# Altium PCB PCB_SquareishDesign.PcbDoc
Units mil, origin at the board's own origin, x right, y up, seen from the top; angles counter-clockwise.
Board outline 4724.41 x 4724.41 mil, 2 copper layers (Top Layer, Bottom Layer); 75 components, 82 nets, 287 pads, 121 vias.
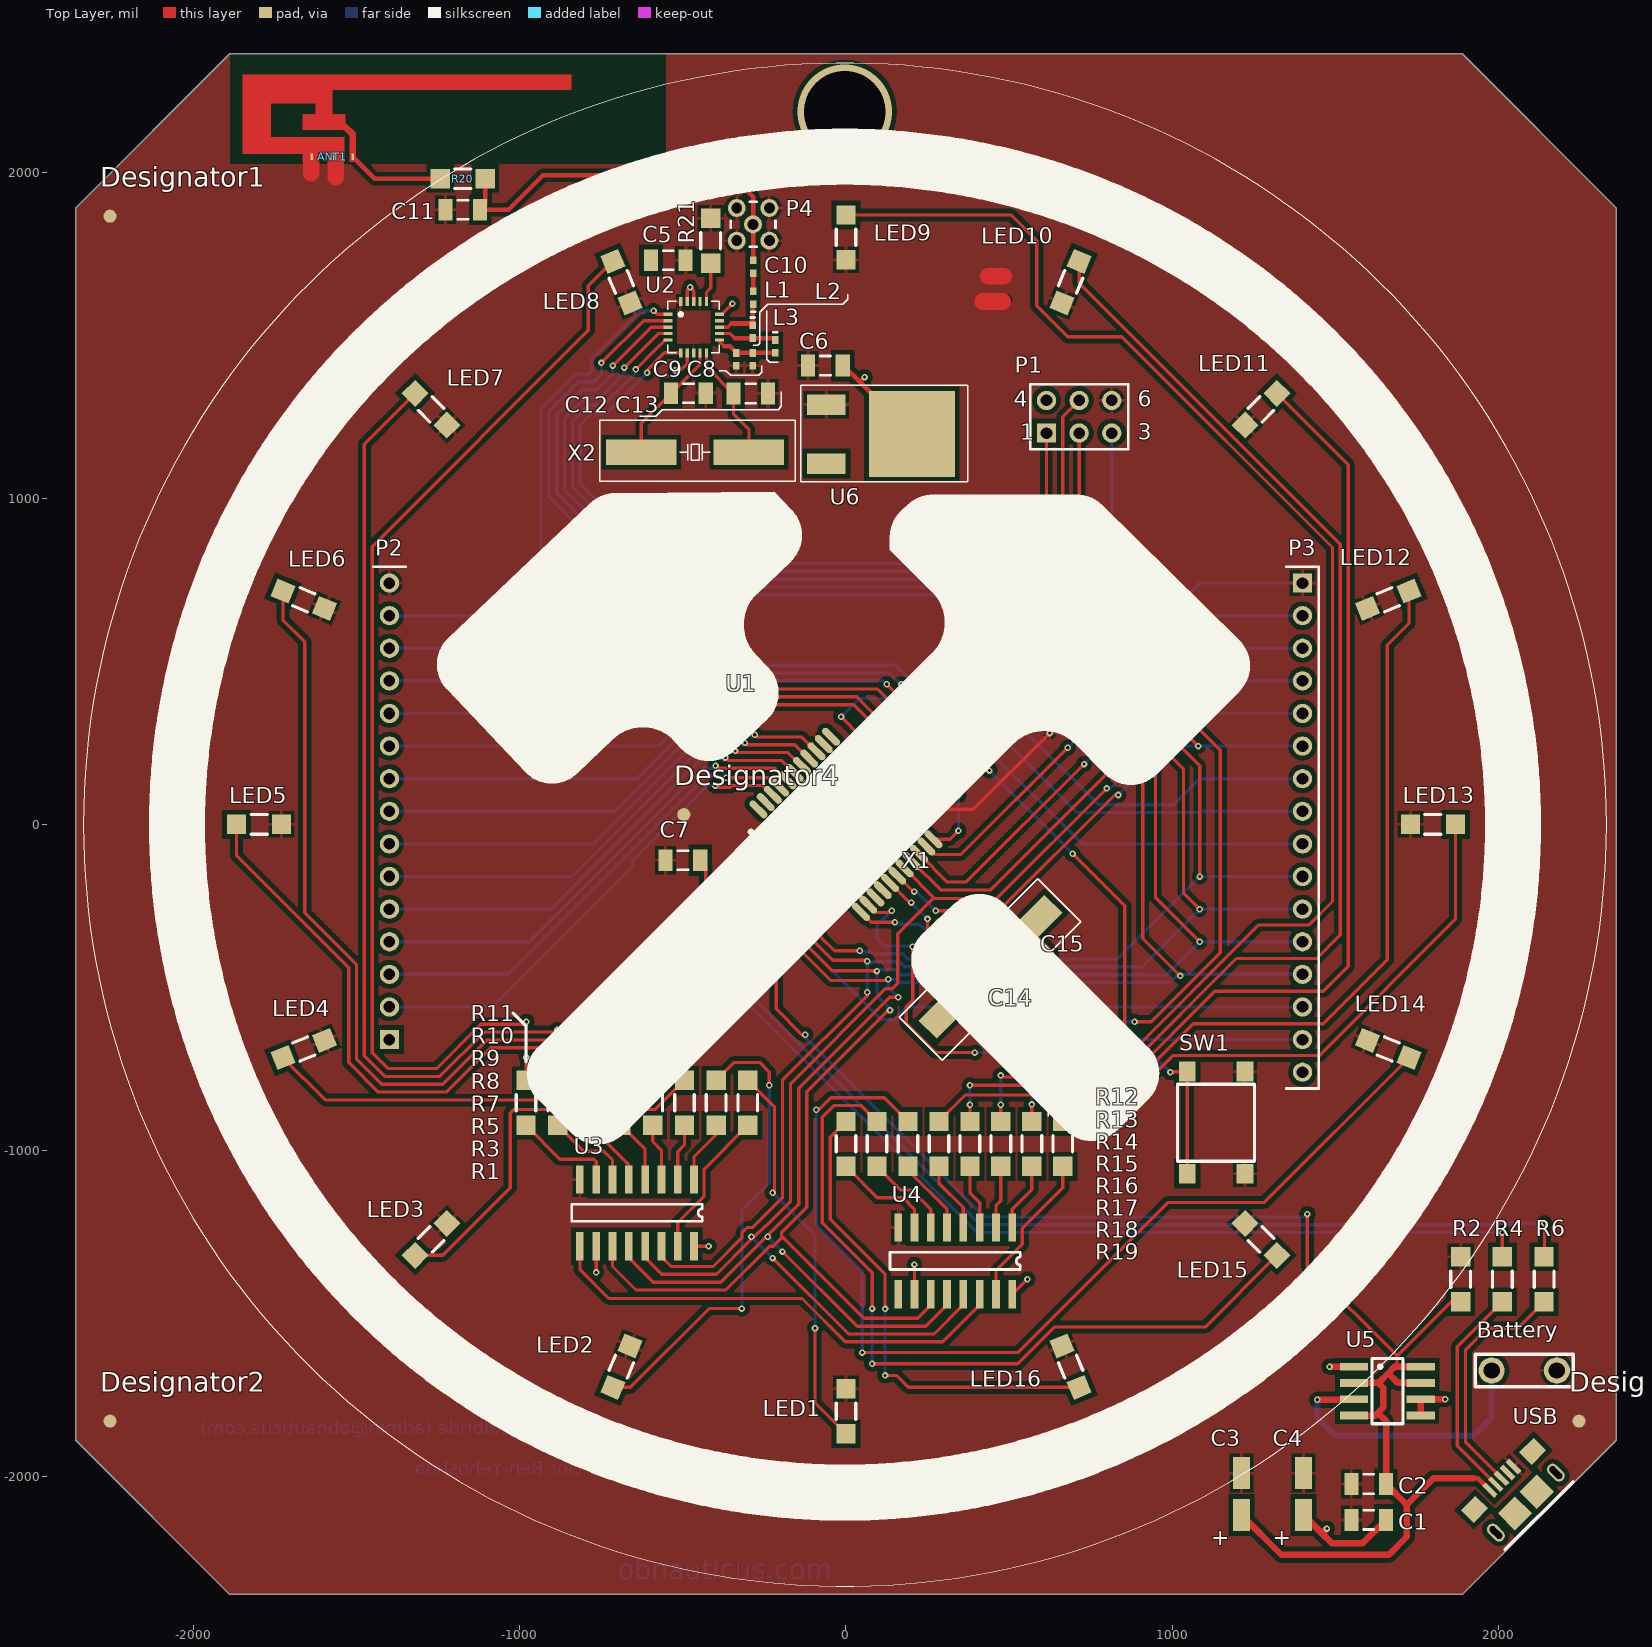
[diagram p0: Top Layer view]
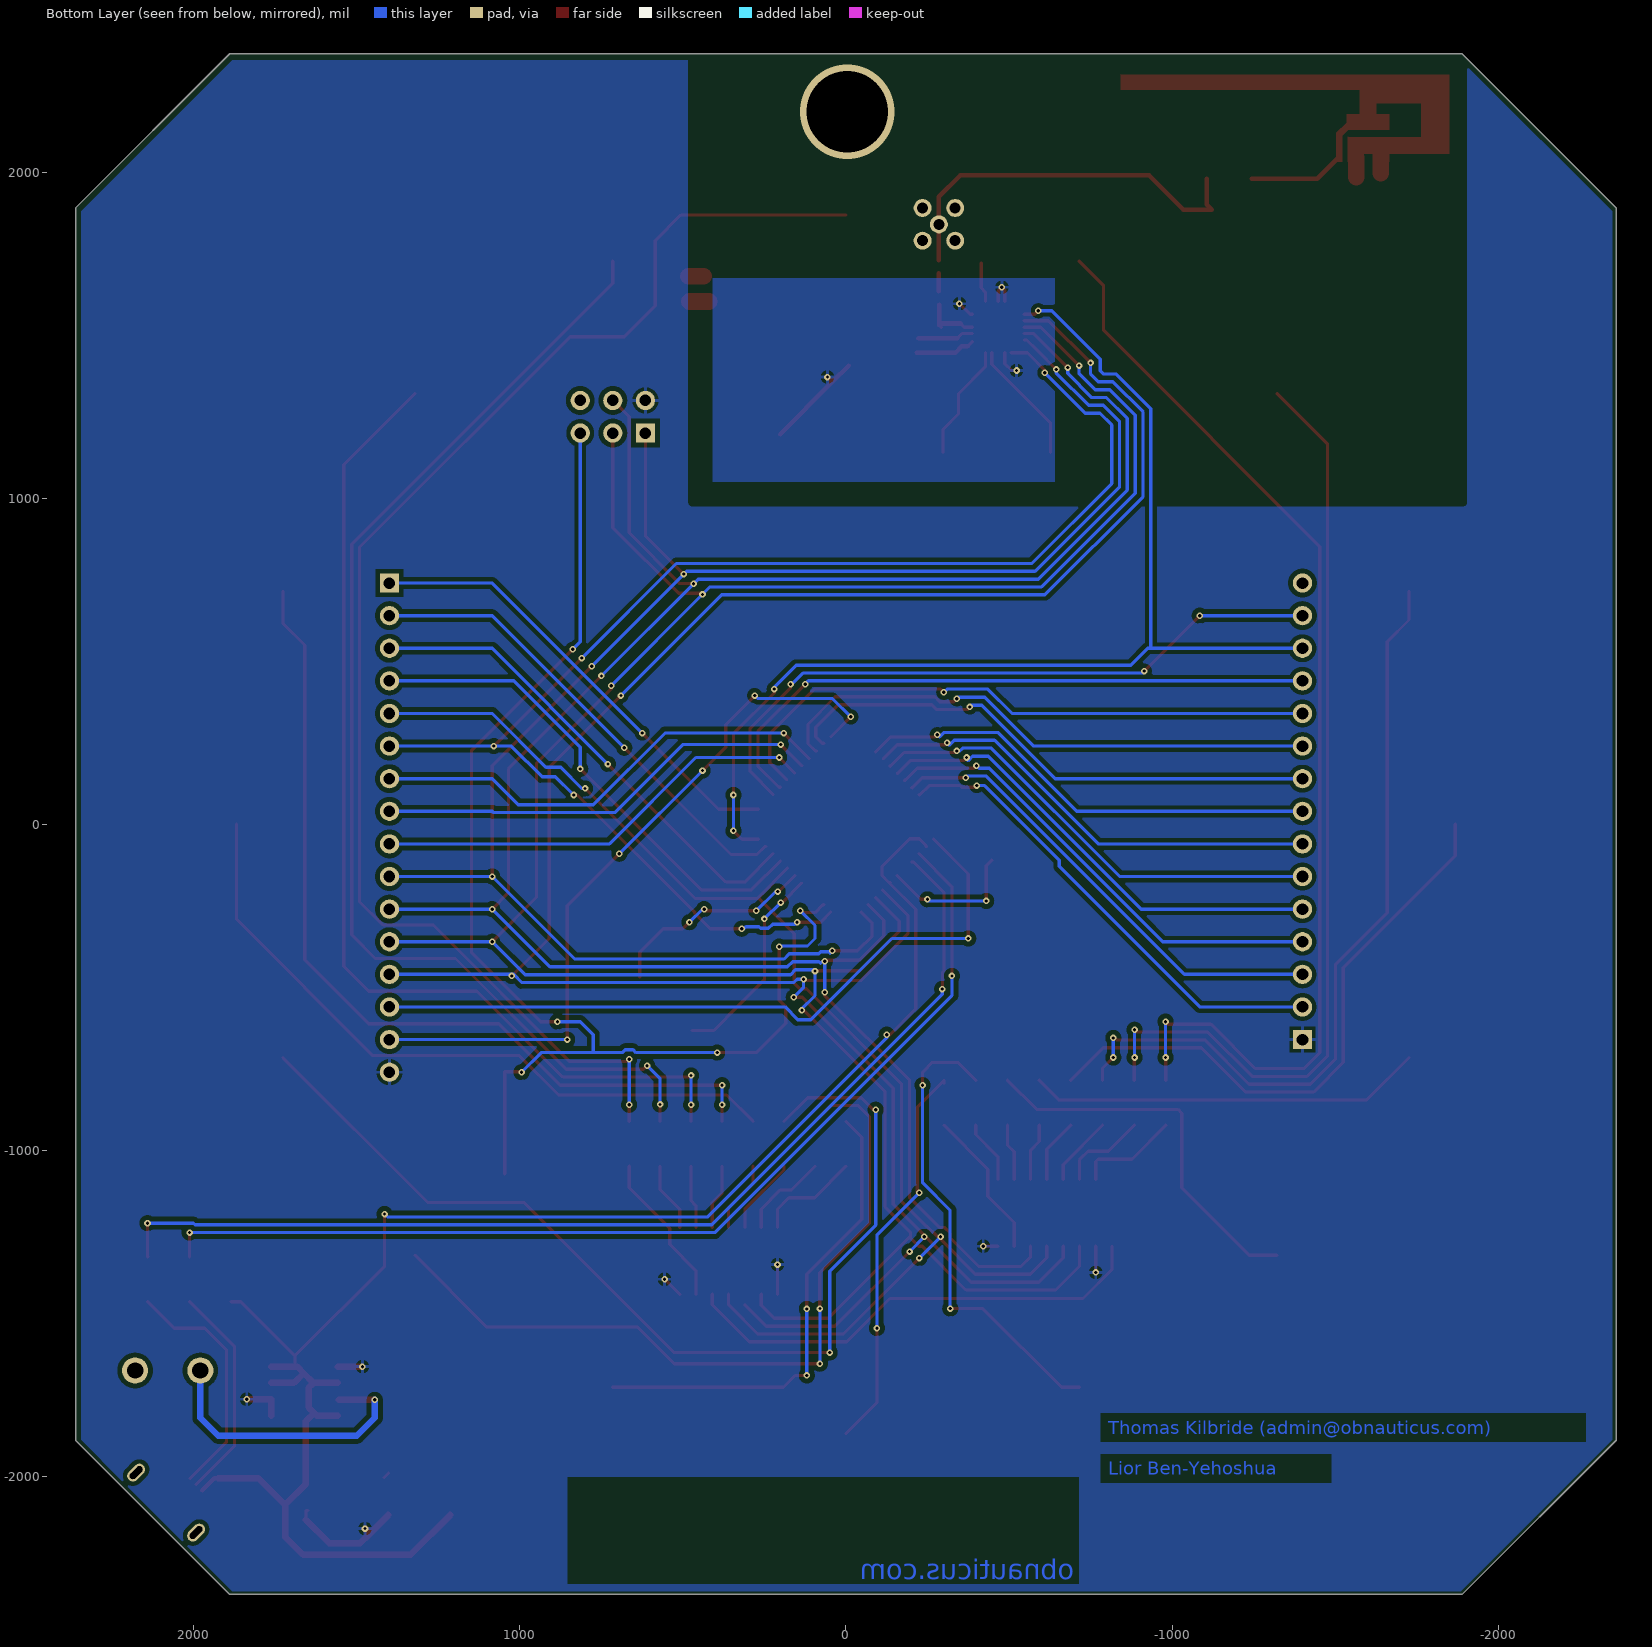
[diagram p1: Bottom Layer view, seen from below]

## Layer stack, top to bottom
Top Solder: solder mask 0.4, Solder Resist, Dk 3.5
Top Layer: signal copper 1.4
Dielectric 1: dielectric 12.6, FR-4, Dk 4.8
Bottom Layer: signal copper 1.4
Bottom Solder: solder mask 0.4, Solder Resist, Dk 3.5

## Board outline
-2362,-1889 -2362,1890.53 -1889.56,2362.97 1889.97,2362.97 2362.41,1890.53 2362.41,-1889 1889.97,-2361.44 -1889.56,-2361.44

## Design rules (kind name [scope] priority, off if disabled: settings)
Clearance [All] p1: gap=14
PolygonConnect [All] p1: connectstyle=Relief reliefconductorwidth=10 reliefentries=4 polygonreliefangle="90 Angle" airgapwidth=10
RoomDefinition MainBoard [InComponentClass('MainBoard')] p1: confinementstyle=ConfineIn formatcopy=TRUE lockcomponents=FALSE outline -5837,-6789 -3837,-6789 -3837,-5789 -5837,-5789
RoutingVias [All] p1: holewidth=10 width=20 viastyle="Through Hole" minholewidth=10 minwidth=20 maxholewidth=10 maxwidth=20
SolderMaskExpansion [All] p1: expansion=4
UnpouredPolygon [All] p1: allowunpoured=FALSE
Width [All] p1: maxlimit=40 minlimit=10 preferedwidth=10
29 further rules are at their usual default settings.

## Classes and differential pairs
component class MainBoard: ANT1 Battery C1 C2 C3 C4 C5 C6 C7 C8 C9 C10 C11 C12 C13 C14 C15 L1 L2 L3 LED1 LED2 LED3 LED4 LED5 LED6 LED7 LED8 LED9 LED10 LED11 LED12 LED13 LED14 LED15 LED16 P1 P2 P3 P4 R1 R2 R3 R4 R5 R6 R7 R8 R9 R10 R11 R12 R13 R14 R15 R16 R17 R18 R19 R20 R21 SW1 U1 U2 U3 U4 U5 U6 USB X1 X2

## Components (designator, comment, footprint, x,y, rotation, side; value= is the part's Value field where it differs from the comment)
ANT1 "INV_F_ANTENNA" INV_F_PCB_ANTENNA -1855.26,2055.09 r0 top
Battery "PowerPins" PowerPins_PCB 2080,-1675 r0 top (schematic designator Battery1)
C1 "Cap Semi" C1206 1603,-2133 r0 top
C2 "Cap Semi" C1206 1603,-2023 r0 top
C3 "Electrolytic Capacitor" sheityCapPackage 1213,-2103 r0 top
C4 "Electrolytic Capacitor" sheityCapPackage 1403,-2103 r0 top
C5 "Cap Semi" C1206 -545,1730 r180 top
C6 "Cap Semi" C1206 -63.13,1406.82 r0 top
C7 "Cap Semi" C1206 -500,-110 r180 top
C8 "Cap Semi" 0402 -286.45,1425.98 r90 top
C9 "Cap Semi" 0402 -336.45,1425.98 r90 top
C10 "Cap Semi" 0402 -285,1710 r270 top
C11 "Cap Semi" C1206 -1175,1885 r180 top
C12 "Cap Semi" C1206 -483.13,1321.82 r180 top
C13 "Cap Semi" C1206 -291.98,1321.09 r180 top
C14 "Cap Semi" C1206 510,-670 r315 top
C15 "Cap Semi" C1206 670,-505 r315 top
Designator1 "Comment" FID_MARKER -2255,1865 r0 top
Designator2 "Comment" FID_MARKER -2255,-1830 r0 top
Designator3 "Comment" FID_MARKER 2250,-1830 r0 top
Designator4 "Comment" FID_MARKER -495,30 r0 top
L1 "Inductor" 0402-A -285,1615 r90 top
L2 "Inductor" 0402-A -286.45,1510.98 r270 top
L3 "Inductor" 0402-A -216.45,1465.98 r270 top
LED1 "LED_Green_1206Package" 1206Package_PCB 0,-1800 r90 top
LED2 "LED_Green_1206Package" 1206Package_PCB -688.83,-1662.98 r67.5 top
LED3 "LED_Green_1206Package" 1206Package_PCB -1272.79,-1272.79 r45 top
LED4 "LED_Green_1206Package" 1206Package_PCB -1662.98,-688.83 r22.5 top
LED5 "LED_Green_1206Package" 1206Package_PCB -1800,0 r0 top
LED6 "LED_Green_1206Package" 1206Package_PCB -1662.98,688.83 r337.5 top
LED7 "LED_Green_1206Package" 1206Package_PCB -1272.79,1272.79 r315 top
LED8 "LED_Green_1206Package" 1206Package_PCB -688.83,1662.98 r292.5 top
LED9 "LED_Green_1206Package" 1206Package_PCB 0,1800 r270 top
LED10 "LED_Green_1206Package" 1206Package_PCB 688.83,1662.98 r247.5 top
LED11 "LED_Green_1206Package" 1206Package_PCB 1272.79,1272.79 r225 top
LED12 "LED_Green_1206Package" 1206Package_PCB 1662.98,688.83 r202.5 top
LED13 "LED_Green_1206Package" 1206Package_PCB 1800,0 r180 top
LED14 "LED_Green_1206Package" 1206Package_PCB 1662.98,-688.83 r157.5 top
LED15 "LED_Green_1206Package" 1206Package_PCB 1272.79,-1272.79 r135 top
LED16 "LED_Green_1206Package" 1206Package_PCB 688.83,-1662.98 r112.5 top
P1 "Header 3X2A" HDR2X3_CEN 615,1200 r0 top
P2 "Header 15" HDR1X15 -1400,-660 r90 top
P3 "Header 16" HDR1X16 1400,740 r270 top
P4 "COAX-M" MMCX2.54-V5 -285,1840 r0 top
R1 "Resistor_1206Package" 1206Package_PCB -301,-854 r90 top
R2 "Resistor_1206Package" 1206Package_PCB 1885,-1395 r270 top
R3 "Resistor_1206Package" 1206Package_PCB -398.14,-854 r90 top
R4 "Resistor_1206Package" 1206Package_PCB 2013,-1395 r270 top
R5 "Resistor_1206Package" 1206Package_PCB -495.29,-854 r90 top
R6 "Resistor_1206Package" 1206Package_PCB 2141,-1395 r270 top
R7 "Resistor_1206Package" 1206Package_PCB -592.43,-854 r90 top
R8 "Resistor_1206Package" 1206Package_PCB -689.57,-854 r90 top
R9 "Resistor_1206Package" 1206Package_PCB -786.71,-854 r90 top
R10 "Resistor_1206Package" 1206Package_PCB -883.86,-854 r90 top
R11 "Resistor_1206Package" 1206Package_PCB -981,-854 r90 top
R12 "Resistor_1206Package" 1206Package_PCB 665,-980 r90 top
R13 "Resistor_1206Package" 1206Package_PCB 570,-980 r90 top
R14 "Resistor_1206Package" 1206Package_PCB 475,-980 r90 top
R15 "Resistor_1206Package" 1206Package_PCB 380,-980 r90 top
R16 "Resistor_1206Package" 1206Package_PCB 285,-980 r90 top
R17 "Resistor_1206Package" 1206Package_PCB 190,-980 r90 top
R18 "Resistor_1206Package" 1206Package_PCB 95,-980 r90 top
R19 "Resistor_1206Package" 1206Package_PCB 0,-980 r90 top
R20 "Resistor_1206Package" 1206Package_PCB -1175,1980 r180 top
R21 "Resistor_1206Package" 1206Package_PCB -415,1790 r90 top
SW1 "PushButton" TactileSwitchPCB 1135,-915 r90 top
U1 "ATmega32U4-AU" 44ML_N 0,0 r45 top
U2 "nRF24L01+" 20-VFQFN -506.45,1445.98 r0 top
U3 "8BitShiftReg" 16-SOIC -466,-1089 r270 top
U4 "8BitShiftReg" 16-SOIC 510,-1236.69 r270 top
U5 "DualNP-ChFET" 8-SOIC 1558,-1813 r0 top
U6 "LD1117DT33TR" DPAK -59.94,1287.37 r270 top
USB "Micro USB Receptacle Type B" USBMicroB_PCB 2085,-2080 r45 top (schematic designator USBMicroB1)
X1 "HC-49S" HC-49S 560,-320 r225 top
X2 "HC-49S" HC-49S -627.49,1140.92 r0 top

## Footprints (in the part's own frame and the unit in brackets; to place one, negate y for a bottom-side part, rotate by r counter-clockwise, add the part's x,y. Pads: shape width x height; smd on the part's side, far side on the other; paste and mask are expansions set on the pad)
8-SOIC [mm]
  rect 2.2x0.6 smd: 1(0,3.81) 2(0,2.54) 3(0,1.27) 4(0,0) 5(5.2,0) 6(5.2,1.27) 7(5.2,2.54) 8(5.2,3.81)
  silkscreen extent 1.4,-0.63 3.81,4.45
16-SOIC [mm]
  rect 2.2x0.6 smd: 1(0,0) 2(0,-1.27) 3(0,-2.54) 4(0,-3.81) 5(0,-5.08) 6(0,-6.35) 7(0,-7.62) 8(0,-8.89) 9(5.2,-8.89) 10(5.2,-7.62) 11(5.2,-6.35) 12(5.2,-5.08) 13(5.2,-3.81) 14(5.2,-2.54) 15(5.2,-1.27) 16(5.2,0)
  silkscreen extent 1.94,-9.53 3.27,0.64
20-VFQFN [mm] "The package"
  rect 0.7x0.25 smd: 1(-1,3) 2(-1,2.5) 3(-1,2) 4(-1,1.5) 5(-1,1) 11(3,1) 12(3,1.5) 13(3,2) 14(3,2.5) 15(3,3)
  rect 0.25x0.7 smd: 6(0,0) 7(0.5,0) 8(1,0) 9(1.5,0) 10(2,0) 16(2,4) 17(1.5,4) 18(1,4) 19(0.5,4) 20(0,4)
  silkscreen extent -1,0 3,4
44ML_N [mm] "Thin QFP, 44-Leads, Body 10x10mm, Pitch 0.8mm, IPC Medium Density"
  oval 1.75x0.55 smd: 1(-5.65,4) 2(-5.65,3.2) 3(-5.65,2.4) 4(-5.65,1.6) 5(-5.65,0.8) 6(-5.65,0) 7(-5.65,-0.8) 8(-5.65,-1.6) 9(-5.65,-2.4) 10(-5.65,-3.2) 11(-5.65,-4) 23(5.65,-4) 24(5.65,-3.2) 25(5.65,-2.4) 26(5.65,-1.6) 27(5.65,-0.8) 28(5.65,0) 29(5.65,0.8) 30(5.65,1.6) 31(5.65,2.4) 32(5.65,3.2) 33(5.65,4)
  oval 0.55x1.75 smd: 12(-4,-5.65) 13(-3.2,-5.65) 14(-2.4,-5.65) 15(-1.6,-5.65) 16(-0.8,-5.65) 17(0,-5.65) 18(0.8,-5.65) 19(1.6,-5.65) 20(2.4,-5.65) 21(3.2,-5.65) 22(4,-5.65) 34(4,5.65) 35(3.2,5.65) 36(2.4,5.65) 37(1.6,5.65) 38(0.8,5.65) 39(0,5.65) 40(-0.8,5.65) 41(-1.6,5.65) 42(-2.4,5.65) 43(-3.2,5.65) 44(-4,5.65)
  silkscreen extent -5.77,-4.35 4.35,4.95, body extent -5,-5 5,5, height 1.2
0402 [mm] "Chip Capacitor, Body 1.0x0.5mm, IPC High Density"
  rect 0.6x0.5 smd: 1(-0.5,0) 2(0.5,0)
  body extent -0.55,-0.3 0.55,0.3, height 1.3
0402-A [mm] "Chip Inductor, Body 1.0x0.5mm, IPC High Density"
  rect 0.6x0.5 smd: 1(-0.5,0) 2(0.5,0)
  silkscreen extent -1.1,-0.15 -1.1,0.15, body extent -0.55,-0.3 0.55,0.3, height 0.55
1206Package_PCB [mm]
  rect 1.5x1.5 smd: 1(-1.75,0) 2(1.75,0)
  silkscreen extent -0.64,-0.76 0.64,0.76
C1206 [mm] "Chip Capacitor, Body 3.2x1.6mm, IPC High Density"
  rect 1.1x1.7 smd: 1(-1.35,0) 2(1.35,0)
  silkscreen extent -0.4,-0.75 0.4,0.75, body extent -1.7,-0.9 1.7,0.9, height 1.3
DPAK [mm]
  rect 1.6x3 smd: 1(0,0) 3(4.6,0)
  rect 6.7x6.7 smd: 2(2.3,6.65)
  silkscreen extent -1.5,-2 6,11
FID_MARKER [mil]
  rrect100% 40x40 smd: 1(-2,0)
HC-49S [mm]
  rect 5.5x2 smd: 1(0,0) 2(8.375,0)
  silkscreen extent -3.25,-2.25 12,2.5
HDR1X15 [mm] "Connector; Header; 15 Position"
  rect 1.5x1.5 hole 0.9: 1(0,0)
  round 1.5 hole 0.9: 2(2.54,0) 3(5.08,0) 4(7.62,0) 5(10.16,0) 6(12.7,0) 7(15.24,0) 8(17.78,0) 9(20.32,0) 10(22.86,0) 11(25.4,0) 12(27.94,0) 13(30.48,0) 14(33.02,0) 15(35.56,0)
  silkscreen extent 36.83,-1.27 36.83,1.27
HDR1X16 [mm] "Connector; Header; 16 Position"
  rect 1.5x1.5 hole 0.9: 1(0,0)
  round 1.5 hole 0.9: 2(2.54,0) 3(5.08,0) 4(7.62,0) 5(10.16,0) 6(12.7,0) 7(15.24,0) 8(17.78,0) 9(20.32,0) 10(22.86,0) 11(25.4,0) 12(27.94,0) 13(30.48,0) 14(33.02,0) 15(35.56,0) 16(38.1,0)
  silkscreen extent -1.27,-1.27 39.37,1.27
HDR2X3_CEN [mm] "Connector; Header; 3x2 Position"
  rect 1.5x1.5 hole 0.9: 1(0,0)
  round 1.5 hole 0.9: 2(2.54,0) 3(5.08,0) 4(0,2.54) 5(2.54,2.54) 6(5.08,2.54)
  silkscreen extent -1.27,-1.27 6.35,3.81
INV_F_PCB_ANTENNA [mm]
  rect 0.2x0.5 smd: 1(5.5,-0.2) 2(7.25,-0.2) 3(8.696,-0.2)
  Top Layer region: 0.127,0.043 0.127,0.04 0.129,0.038 0.131,0.037 0.133,0.036 0.133,0.036 4.81,0.047 4.81,-0.598 4.811,-0.6 4.812,-0.602 4.814,-0.604 4.817,-0.604 4.817,-0.604 6.077,-0.601 6.081,-0.6 6.083,-0.598 6.084,-0.595 6.084,-0.595 6.084,0.05 6.775,0.052 6.775,-0.593 6.776,-0.596 6.777,-0.598 6.779,-0.599 6.782,-0.6 6.782,-0.6 8.016,-0.597 8.02,-0.596 8.022,-0.593 8.023,-0.59 8.023,-0.59 8.023,-0.033 8.023,1.343 8.022,1.346 8.021,1.348 8.019,1.35 8.016,1.35 8.016,1.35 2.32,1.337 2.32,3.977 5.81,3.985 5.81,3.109 4.817,3.107 4.814,3.106 4.811,3.103 4.81,3.1 4.81,3.1 4.81,1.897 4.811,1.895 4.812,1.893 4.814,1.891 4.817,1.891 4.817,1.891 8.014,1.898 8.459,1.456 8.459,-0.589 8.46,-0.592 8.461,-0.594 8.463,-0.595 8.466,-0.596 8.466,-0.596 8.926,-0.595 8.929,-0.594 8.932,-0.591 8.933,-0.588 8.933,-0.588 8.933,1.649 8.932,1.652 8.931,1.654 8.931,1.654 8.931,1.654 8.931,1.654 8.931,1.654 8.931,1.654 8.931,1.654 8.118,2.46 8.118,3.108 8.118,3.11 8.116,3.112 8.114,3.114 8.112,3.114 8.112,3.114 7.119,3.112 7.119,3.995 7.119,4.982 25.708,5.026 25.711,5.027 25.713,5.029 25.714,5.032 25.714,5.032 25.714,6.235 25.714,6.238 25.712,6.24 25.71,6.241 25.708,6.242 25.708,6.242 0.134,6.182 0.13,6.181 0.128,6.179 0.127,6.176 0.127,6.176 0.127,4.973 0.127,3.979 0.127,1.325
MMCX2.54-V5 [mm] "Connector; RF Coaxial, MMCX, Thru-Hole; 5 Position; Vertical"
  round 1.4 hole 0.85: 1(0,0) 2(-1.27,-1.27) 3(1.27,-1.27) 4(1.27,1.27) 5(-1.27,1.27)
  silkscreen extent -1.75,-1.75 1.75,1.75
PowerPins_PCB [mil]
  round 80 hole 50: 1(-100,0) 2(100,0)
  silkscreen extent -150,-50 150,50
sheityCapPackage [mm] "This is jank"
  rect 1.3x2.5 smd: 1(0,-0.375) 2(0,2.875)
TactileSwitchPCB [mm]
  rect 1.55x1.3 smd: 1(-3.975,2.25) 2(3.975,2.25) 3(-3.975,-2.25) 4(3.975,-2.25)
  silkscreen extent -3,-3 3,3
USBMicroB_PCB [mm]
  rect 0.4x1.35 smd: 1(-1.3,2.667) 2(-0.65,2.667) 3(0,2.675) 4(0.65,2.667) 5(1.3,2.667)
  oval 0.9x1.6 hole 0.5 slot 1.2 at 90 deg: CASE(-3.3,0) CASE(3.3,0)
  rect 1.6x1.4 smd: CASE(-3.2,2.45) CASE(3.2,2.45)
  rect 1.9x1.9 smd: CASE(-1.2,0) CASE(1.2,0)
  silkscreen extent -3.75,-1.45 3.75,-1.45

## Part data
ANT1: library part INV_V_ANTENNA
C1 C2 C5 C6 C7 C8 C9 C10 C11 C12 C13 C14 C15: "Capacitor (Semiconductor SIM Model)"
C3 C4: "asdf"
LED1 LED2 LED3 LED4 LED5 LED6 LED7 LED8 LED9 LED10 LED11 LED12 LED13 LED14 LED15 LED16: "Green LED"
P1: "Header, 3-Pin, Dual row"
P2: "Header, 15-Pin"
P3: "Header, 16-Pin"
P4: "RF Coaxial PCB Connector, MMCX; Thru-Hole, Vertical Mount Plug,  50 Ohm Impedance"
R1 R2 R3 R4 R5 R6 R7 R8 R9 R10 R11 R12 R13 R14 R15 R16 R17 R18 R19 R20 R21: "Resistor 1206"
SW1: library part TactileButton, "Normally open push button."
U1: "8-bit AVR Microcontroller, 2.7-5.5V, 32KB Flash, 2.5KB EEPROM, 1KB SRAM, USB Controller, 44-pin TQFP, Industrial Grade (-40°C to 85°C)"
U2: "2.4GHz RF Transceiver"
U3 U4: library part 8BitShiftRegister
U5: library part "Dual N & P-Channel MOSFET"
USB: library part USBMicroB

## Via types
v1: diameter 20, hole 10, Top Layer to Bottom Layer, 120 vias
v2: diameter 289.37, hole 250, Top Layer to Bottom Layer, 1 vias

## Nets (pads, with @x,y where several pads share a name; then routed paths per layer and width w, separated by ;. In a path a pad name is that pad's centre, name@x,y a point inside that pad or via, vN(x,y) a via of type N, cw(c..) or ccw(c..) an arc to the next point about the centre after c; other vN are vias at no path point)
3V3: C6.2 U2.7 U2.15 U2.18 U2.19 U6.2 | length 544.8
  Top Layer w10: v1(-523.13,1391.82) -508.13,1391.82 -486.76,1413.18 U2.7 ; U2.19 -486.76,1638.18 v1(-478.13,1646.82) -467.08,1635.77 U2.18 ; U2.15 -380.85,1564.09 v1(-348.13,1596.82)
  Top Layer w14: C6.2@-8.13,1406.82 41.87,1356.82 ; v1(56.87,1371.82) 41.87,1356.82 ; U6.2 41.87,1356.82
ANT1: L2.2 L3.1 U2.12 | length 172
  Top Layer w10: U2.12 -355.51,1505.04 -341.76,1491.3
  Top Layer w14: -341.76,1491.3 L2.2 L3.1@-222.08,1491.3
ANT2: L1.1 L2.1 U2.13 | length 172.8
  Top Layer w10: U2.13 -362.71,1524.72 -351.45,1535.98 ; L2.1@-292.39,1524.72 L2.1
  Top Layer w14: -351.45,1535.98 L2.1@-291.77,1535.98 ; L2.1 L1.1@-286.45,1593.87
BATT: Battery.1 U5.3 | length 891.6
  Top Layer w20: v1(1445,-1765) U5.3@1556,-1765
  Bottom Layer w20: v1(1445,-1765) 1445,-1820 1500,-1875 1925,-1875 1980,-1820 Battery.1
D+: R6.1 U1.4 | length 3287.7
  Top Layer w10: v1(-295,-505) -296,-504 -296,-452.99 -301,-447.99 -301,-209.56 -206.55,-115.11 U1.4@-201.83,-115.11 ; R6.1 2142,-1325.1 v1(2142,-1223)
  Bottom Layer w10: v1(-295,-505) -295,-521.06 411.94,-1228 1995.99,-1228 2000.99,-1223 v1(2142,-1223)
D-: R4.1 U1.3 | length 3189.6
  Top Layer w10: v1(-325,-465) -325,-191.37 U1.3 ; R4.1 v1(2013,-1252)
  Bottom Layer w10: v1(-325,-465) -325,-525 402,-1252 v1(2013,-1252)
GND: ANT1.1 ANT1.2 Battery.2 C1.1 C2.1 C3.2 C4.2 C5.1 C6.1 C7.2 C8.1 C9.1 C11.2 C12.1 C13.1 C14.2 C15.2 LED1.2 LED2.2 LED3.2 LED4.2 LED5.2 LED6.2 LED7.2 LED8.2 LED9.2 LED10.2 LED11.2 LED12.2 LED13.2 LED14.2 LED15.2 LED16.2 P1.6 P2.15 P3.1 P4.2 P4.3 P4.4 P4.5 R2.1 R21.2 SW1.3 SW1.4 U1.5 U1.15 U1.23 U1.35 U1.43 U2.8 U2.14 U2.17 U2.20 U3.8 U4.8 U6.1 USB.5 | length 1654.8
  Top Layer w10: U1.23 390.93,45.93 v1(625,280) ; C4.2 C4.2@1416.19,-2003
  Top Layer w51.18: -1640,1996.96 ANT1.1@-1640,2045 ; -1565,1984.41 -1565,2045 ; 419.43,1603.43 480.02,1603.43 ; 435.98,1680.43 484.02,1680.43
  Bottom Layer w10: v1(625,280) 1085,740 P3.1
LED1: R1.1 U3.15 | length 459.9
  Top Layer w10: U3.15 -516,-1220.99 -435.19,-1140.18 -435.19,-1057.09 R1.1
LED2: R3.1 U3.1 | length 194.2
  Top Layer w10: U3.1 -466,-1019 -398.14,-951.14 R3.1
LED3: R5.1 U3.2 | length 174.7
  Top Layer w10: U3.2 -516,-1004 -495.29,-983.29 R5.1
LED4: R7.1 U3.3 | length 177
  Top Layer w10: R7.1 -592.43,-972.57 -566,-999 U3.3
LED5: R8.1 U3.4 | length 196.6
  Top Layer w10: R8.1 -616,-996.47 U3.4
LED6: R9.1 U3.5 | length 216.1
  Top Layer w10: R9.1 -666,-1043.61 U3.5
LED7: R10.1 U3.6 | length 271.8
  Top Layer w10: R10.1 -804.06,-1002.69 -742.31,-1002.69 -716,-1029 U3.6
LED8: R11.1 U3.7 | length 316
  Top Layer w10: R11.1 -877.2,-1026.69 -773.31,-1026.69 -766,-1034 U3.7
LED9: R12.1 U4.15 | length 477.4
  Top Layer w10: U4.15 460,-1368.68 540.81,-1287.87 540.81,-1239.19 665,-1115 R12.1
LED10: R13.1 U4.1 | length 212.6
  Top Layer w10: U4.1 510,-1180 570,-1120 R13.1
LED11: R14.1 U4.2 | length 194
  Top Layer w10: U4.2 460,-1170 475,-1155 R14.1
LED12: R15.1 U4.3 | length 200.2
  Top Layer w10: R15.1 380,-1130 410,-1160 U4.3
LED13: R16.1 U4.4 | length 218.9
  Top Layer w10: R16.1 285,-1100 360,-1175 U4.4
LED14: R17.1 U4.5 | length 237.5
  Top Layer w10: R17.1 190,-1060 310,-1180 U4.5
LED15: R18.1 U4.6 | length 276
  Top Layer w10: R18.1 167.1,-1121 201,-1121 260,-1180 U4.6
LED16: R19.1 U4.7 | length 321
  Top Layer w10: R19.1 96.1,-1145 175,-1145 210,-1180 U4.7
MISO: P1.1 P3.10 U1.11 U2.5 | length 5408.3
  Top Layer w10: v1(-645,1394.95) -583.13,1456.82 -554.59,1485.35 U2.5 ; U1.11 -80,-302.71 -80,-343.18 -35.18,-388 v1(42,-388) ; v1(497.5,767.5) 615,885 P1.1 ; v1(780,485) 1085,180 v1(1085,-160)
  Bottom Layer w10: v1(-645,1394.95) -645,1383.94 -744,1284.94 -789,1284.94 -839,1234.94 -839,1035.06 -579.94,776 489,776 v1(497.5,767.5) v1(780,485) ; v1(42,-388) 48.99,-394.99 52.99,-391 77.01,-391 83.01,-397 173.82,-397 189.82,-413 832,-413 v1(1085,-160) P3.10
MOSI: P1.5 P3.11 U1.10 U2.4 U3.14 | length 7140.4
  Top Layer w10: v1(-680,1400.96) -575.92,1505.04 U2.4 ; U3.14 -566,-1325.71 -535.68,-1356.03 -407.02,-1356.03 -319,-1268.01 -319,-1252.99 -302.01,-1236 -285.95,-1236 -195,-1145.05 ; -195,-1144.01 -195,-785 65,-525 v1(65,-515) ; U1.10 -116.06,-294.23 -116.06,-341.06 -40.12,-417 62,-417 v1(65,-420) ; v1(467.5,737.5) 468.5,738.5 509.51,738.5 665,893.99 665,1250 P1.5 ; v1(750,455) 1035,170 1035,-210 v1(1085,-260)
  Bottom Layer w10: v1(-680,1400.96) -680,1382.88 -753.94,1308.94 -798.94,1308.94 -863,1244.88 -863,1025.12 -589.88,752 453,752 v1(467.5,737.5) v1(750,455) ; v1(65,-515) 65,-421 v1(65,-420) 64,-421 73.07,-421 78.03,-425.96 82.99,-421 163.88,-421 179.88,-437 908,-437 v1(1085,-260) P3.11
NetANT1_3: ANT1.3 R20.2 | length 296.8
  Top Layer w14: ANT1.3 -1445.68,1980 R20.2
NetC7_1: C7.1 U1.6 | length 439.8
  Top Layer w10: C7.1 -430,-126.85 v1(-430,-235) ; v1(-250,-230) -230,-230 U1.6
  Bottom Layer w10: v1(-430,-235) -250,-235 v1(-250,-230)
NetC10_1: C10.1 C11.1 P4.1 R20.1 | length 1204.1
  Top Layer w14: R20.1 -1106.1,1900.75 C11.1 -1035,1885 -930,1990 -350,1990 -285,1925 C10.1
NetC10_2: C10.2 L1.2 | length 55.6
  Top Layer w14: L1.2 C10.2
NetC12_2: C12.2 U2.9 X2.1 | length 379.7
  Top Layer w10: X2.1 -627.49,1230.61 C12.2 -447.39,1410.7 U2.9
NetC13_2: C13.2 U2.10 X2.2 | length 358.5
  Top Layer w10: -427.71,1403.66 U2.10 ; -427.43,1403.38 C13.2 -345.13,1258.82 -297.76,1211.45 X2.2
NetC14_1: C14.1 U1.16 X1.2 | length 634.1
  Top Layer w10: U1.16 195.46,-240 v1(200,-240) ; v1(250,-290) 250,-476.3 X1.2 406.12,-632.42 C14.1
  Bottom Layer w10: v1(200,-240) v1(250,-290)
NetC15_1: C15.1 U1.17 X1.1 | length 651.7
  Top Layer w10: U1.17 206,-206 v1(209.53,-206) ; v1(275,-265) 430,-265 v1(435,-260) ; v1(480,-300) 500,-320 X1.1 632.42,-392.42 C15.1
  Bottom Layer w10: v1(209.53,-206) 216,-206 v1(275,-265) ; v1(435,-260) 440,-260 v1(480,-300)
NetLED1_1: LED1.1 R1.2 | length 1226.3
  Top Layer w10: R1.2@-301,-794.43 R1.2 -219,-867.1 -219,-1130 v1(-225,-1130) ; v1(-95,-1545) -95,-1773.9 LED1.1
  Bottom Layer w10: v1(-225,-1130) -95,-1260 v1(-95,-1545)
NetLED2_1: LED2.1 R3.2 | length 1453.9
  Top Layer w10: LED2.1 -661.64,-1726.64 -420,-1485 v1(-320,-1485) ; R3.2 -343.04,-730 -265,-730 -235,-760 v1(-235,-800)
  Bottom Layer w10: v1(-320,-1485) -319,-1484 -319,-1182.99 -235,-1098.99 v1(-235,-800)
NetLED3_1: LED3.1 R5.2 | length 1182.6
  Top Layer w10: LED3.1 -1236.51,-1321.51 -1029.53,-1114.53 -1029.53,-885.5 -1018.4,-874.37 -584.55,-874.37 R5.2
NetLED4_1: LED4.1 R7.2 | length 1212.8
  Top Layer w10: LED4.1 -1596.83,-845 -652.33,-845 R7.2
NetLED5_1: LED5.1 R8.2 | length 1843.4
  Top Layer w10: LED5.1 -1868.9,-96.1 -1525,-440 -1525,-730 -1434,-821 -1226,-821 -1090,-685 -789.67,-685 R8.2
NetLED6_1: LED6.1 R9.2 | length 2444.3
  Top Layer w10: LED6.1 -1726.64,626.64 -1660,560 -1660,-271.06 -1501,-430.06 -1501,-720.06 -1424.06,-797 -1235.94,-797 -1099.94,-661 -830,-661 -824,-655 v1(-820,-655) ; v1(-820,-715) -786.71,-748.29 R9.2
  Bottom Layer w10: v1(-820,-715) v1(-820,-655)
NetLED7_1: LED7.1 R10.2 | length 2928.9
  Top Layer w10: LED7.1 -1477,1166.02 -1477,-710.12 -1414.12,-773 -1245.88,-773 -1109.88,-637 -892,-637 v1(-885,-630) ; v1(-885,-715) -883.86,-716.14 R10.2
  Bottom Layer w10: v1(-885,-715) v1(-885,-630)
NetLED8_1: LED8.1 R11.2 | length 3465.8
  Top Layer w10: R11.2 -981,-716 v1(-980,-715) ; v1(-980,-605) -988,-613 -1119.82,-613 -1255.82,-749 -1404.18,-749 -1453,-700.18 -1453,852 -790,1515 -790,1651.83 LED8.1
  Bottom Layer w10: v1(-980,-715) v1(-980,-605)
NetLED9_1: LED9.1 R12.2 | length 4344.3
  Top Layer w10: LED9.1 506.1,1868.9 585,1790 585,1590 680,1495 846.06,1495 1492,849.06 1492,-236.63 1420.1,-308.53 1266.53,-308.53 848.06,-727 667,-727 665,-725 v1(665,-720) ; R12.2 v1(665,-860)
  Bottom Layer w10: v1(665,-860) v1(665,-720)
NetLED10_1: LED10.1 R13.2 | length 3666.2
  Top Layer w10: R13.2 v1(570,-859) ; v1(610,-740) 621,-751 858,-751 1197.52,-411.47 1443.53,-411.47 1516,-339 1516,859 715.2,1659.8 LED10.1
  Bottom Layer w10: v1(570,-859) 570,-780 v1(610,-740)
NetLED11_1: LED11.1 R14.2 | length 3198.9
  Top Layer w10: R14.2 v1(475,-860) ; v1(475,-770) 475,-775 867.94,-775 1131.47,-511.47 1463.53,-511.47 1540,-435 1540,1103.02 LED11.1
  Bottom Layer w10: v1(475,-860) v1(475,-770)
NetLED12_1: LED12.1 R15.2 | length 2708.4
  Top Layer w10: R15.2 v1(380,-860) ; v1(380,-800) 876.88,-800 1065.41,-611.47 1463.53,-611.47 1660,-415 1660,550 1726.64,616.64 LED12.1
  Bottom Layer w10: v1(380,-860) v1(380,-800)
NetLED13_1: LED13.1 R16.2 | length 2131.8
  Top Layer w10: R16.2 366.1,-830 880.82,-830 1001.83,-708.99 1451.01,-708.99 1868.9,-291.1 LED13.1
NetLED14_1: LED14.1 R17.2 | length 3180.9
  Top Layer w10: v1(-91,-875.16) -83.93,-875.16 -47.34,-838.57 117.47,-838.57 R17.2 ; v1(50,-1620) 526.42,-1620 986.42,-1160 1281.83,-1160 LED14.1
  Bottom Layer w10: v1(-91,-875.16) -91,-1229 50,-1370 v1(50,-1620)
NetLED15_1: LED15.1 R18.2 | length 2401.3
  Top Layer w10: v1(80,-1653.99) 526.38,-1653.99 638.61,-1541.75 1101.27,-1541.75 LED15.1 ; v1(80,-1485) 80.53,-1484.47 80.53,-1374.47 -72.53,-1221.41 -72.53,-897.7 -37.4,-862.57 46.47,-862.57 R18.2
  Bottom Layer w10: v1(80,-1653.99) v1(80,-1485)
NetLED16_1: LED16.1 R19.2 | length 1479.2
  Top Layer w10: R19.2 -48.53,-959.63 -48.53,-1211.47 120,-1380 v1(120,-1486) ; v1(120,-1690) 155,-1690 191.64,-1726.64 LED16.1
  Bottom Layer w10: v1(120,-1690) v1(120,-1486)
NetP2_2: P2.2 U1.42 | length 1484.2
  Top Layer w10: v1(-401,119) -396,114 -354.99,114 -349.99,119 -254.99,119 -226.46,90.48 U1.42
  Bottom Layer w10: P2.2 -1085,-560 -654,-129 -654,-110.06 -424.94,119 v1(-401,119)
NetP2_3: P2.3 U1.41 | length 1465.6
  Top Layer w10: v1(-367,143) -234.44,143 -203.01,111.57 U1.41
  Bottom Layer w10: P2.3 -1037.88,-460 -429.88,148 -372,148 v1(-367,143)
NetP2_4: P2.4 U1.40 | length 1463.7
  Top Layer w10: v1(-400,180) -392,172 -218.9,172 -180.74,133.84 U1.40
  Bottom Layer w10: P2.4 -971.82,-360 -439.82,172 -408,172 v1(-400,180)
NetP2_5: P2.5 U1.39 | length 1470.2
  Top Layer w10: v1(-370,205) -361,196 -198.36,196 -158.47,156.11 U1.39
  Bottom Layer w10: P2.5 -905.76,-260 -436.76,209 -387.99,209 -374.49,195.51 -370,200 v1(-370,205)
NetP2_6: P2.6 U1.38 | length 1451.7
  Top Layer w10: v1(-340,225) -335,220 -177.82,220 -136.2,178.38 U1.38
  Bottom Layer w10: P2.6 -839.71,-160 -445.71,234 -357.99,234 -348.99,225 v1(-340,225)
NetP2_7: P2.7 U1.37 | length 1447.3
  Top Layer w10: v1(-310,250) -304,244 -157.28,244 U1.37@-113.93,200.65
  Bottom Layer w10: P2.7 -1085,-60 -773.65,-60 -455.65,258 -331.99,258 -316.99,243.01 v1(-310,250)
NetP2_8: P2.8 U1.36 | length 1438.8
  Top Layer w10: v1(-280,275) -273,268 -136.73,268 U1.36@-91.66,222.92
  Bottom Layer w10: P2.8 -1085,40 -707.59,40 -465.59,282 -300.99,282 -286.99,268.01 v1(-280,275)
NetP2_9: P2.9 U1.32 | length 1687.7
  Top Layer w10: v1(-380,360) -372,352 -278.05,352 -263.05,367 23.17,367 92.46,297.7 92.46,268.27 72.93,248.74 U1.32@68.21,248.74
  Bottom Layer w10: P2.9 -1085,140 -641.53,140 -416.53,365 -385,365 v1(-380,360)
NetP2_10: P2.10 U1.31 | length 1718.7
  Top Layer w10: v1(-340,385) -331,376 -287.99,376 -272.99,391 33.11,391 ; 35.11,389 116.46,307.65 116.46,247.73 94.02,225.28 U1.31@89.3,225.28
  Bottom Layer w10: P2.10 -1085,240 -575.47,240 -425.47,390 -345,390 v1(-340,385)
NetP2_11: P2.11 U1.27 | length 1893.7
  Top Layer w10: v1(-300,405) -290,415 96.93,415 234,277.93 234,189 U1.27@181.2,136.2
  Bottom Layer w10: P2.11 -509.41,340 -434.41,415 -310,415 v1(-300,405)
NetP2_12: P2.12 U1.26 | length 1936.8
  Top Layer w10: v1(125,430) 270,285 270,178.56 205.37,113.93 U1.26@200.65,113.93
  Bottom Layer w10: P2.12 -1085,440 115,440 v1(125,430)
NetP2_14: P2.14 U1.25 | length 2076.8
  Top Layer w10: v1(-1085,640) v1(-915,470) ; v1(170,430) 170,418.94 294,294.94 294,162.73 224.1,92.84 U1.25
  Bottom Layer w10: P2.14 v1(-1085,640) ; v1(-915,470) -909,464 132.01,464 166.01,430 v1(170,430)
NetP3_2: P3.2 U1.21 | length 1467.1
  Top Layer w10: U1.21 248.73,-68.21 272.99,-92.46 352.54,-92.46 v1(680,235)
  Bottom Layer w10: v1(680,235) 1085,640 P3.2
NetP3_3: P3.3 U1.20 | length 1508.7
  Top Layer w10: U1.20 310.63,-177 368,-177 v1(730,185)
  Bottom Layer w10: v1(730,185) 1085,540 P3.3
NetP3_4: P3.4 U1.19 | length 1538.9
  Top Layer w10: U1.19 290.08,-201 444,-201 v1(815,170)
  Bottom Layer w10: v1(815,170) 815,236.06 1018.94,440 1085,440 P3.4
NetP3_7: P3.7 U1.30 | length 1443.9
  Top Layer w10: U1.30 v1(190.92,280)
  Bottom Layer w10: v1(190.92,280) 555,280 775,60 1005,60 1085,140 P3.7
NetP3_8: P3.8 U1.29 | length 1379.9
  Top Layer w10: U1.29 v1(200,244.54)
  Bottom Layer w10: v1(200,244.54) 500.46,244.54 709,36 1081,36 1085,40 P3.8
NetP3_9: P3.9 U1.28 | length 1372.2
  Top Layer w10: U1.28 v1(205,205)
  Bottom Layer w10: v1(205,205) 460,205 725,-60 1085,-60 P3.9
NetR4_2: R4.2 USB.2 | length 665.8
  Top Layer w10: USB.2 1875,-1906.19 1875,-1601.9 R4.2
NetR6_2: R6.2 USB.3 | length 742.3
  Top Layer w10: USB.3 1900,-1895 1900,-1610.84 1965.84,-1545 2059.9,-1545 R6.2
NetR21_1: R21.1 U2.16 | length 122.9
  Top Layer w10: U2.16 -427.71,1632.29 -415,1645 R21.1
NetU3_9: U3.9 U4.14 | length 1468.3
  Top Layer w10: U3.9 -816,-1365.01 -726.91,-1454.1 -134.84,-1454.1 -1.94,-1587 296.4,-1587 410,-1473.41 U4.14
PB7: P3.6 U1.12 U2.6 | length 4432.9
  Top Layer w10: v1(-610,1385) -612.65,1387.65 -612.65,1390 -556.67,1445.98 U2.6 ; U1.12 77.29,-300 v1(150,-300) ; v1(320,-320) 416.01,-320 464,-272.01 464,-269.94 823.94,90 v1(835,90) ; v1(810,510) v1(1080,240) v1@1085,240
  Bottom Layer w10: v1(-610,1385) -734.06,1260.94 -779.06,1260.94 -815,1225 -815,1045 -570,800 520,800 v1(810,510) ; v1(150,-300) 156,-306 224.99,-306 237.99,-319 262.01,-319 267.01,-314 306.93,-314 312.93,-320 v1(320,-320) ; v1(835,90) 891,146 932.01,146 1026.01,240 v1(1080,240) P3.6
PD0: P3.5 U1.18 U3.13 U4.13 | length 4061.2
  Top Layer w10: U3.13 -616,-1329 -564.97,-1380.03 -397.08,-1380.03 -290,-1272.95 v1(-290,-1265) -281.01,-1265 -247.89,-1231.88 -246,-1231.88 -170,-1155.88 -170,-795 121,-504 142.01,-504 159,-487.01 159,-335.54 269.54,-225 ; v1(-225,-1330) 8,-1563 270.4,-1563 360,-1473.41 U4.13 ; U1.18 269.54,-225 ; v1(800,110) 462.93,-227.07 271.61,-227.07 269.54,-225
  Bottom Layer w10: v1(-290,-1265) v1(-225,-1330) ; v1(800,110) 810,110 875,175 920,175 1085,340 P3.5
PD5: P2.13 U1.22 U2.1 | length 3522.5
  Top Layer w10: v1(-590,1575) -579.09,1564.09 U2.1 ; v1(220,415) 220,402.88 345,277.88 v1(345,90) ; U1.22 319.07,-45.93 v1(345,-20)
  Bottom Layer w10: P2.13 -935,540 ; v1(-590,1575) -631.01,1575 -779.85,1426.16 -779.85,1391.09 -790,1380.94 -828.76,1380.94 -935,1274.71 -935,540 ; v1(220,415) 220,421.01 153.01,488 -873,488 -925,540 -935,540 ; v1(345,-20) v1(345,90)
PE2: P3.15 U1.33 | length 2246.4
  Top Layer w10: v1(-15,329.58) U1.33 ; v1(280,395) 369,306 369,236 v1(440,165) ; v1(695,-90) 855,-250 v1(855,-660)
  Bottom Layer w10: v1(-15,329.58) 41.42,386 271,386 v1(280,395) ; v1(440,165) v1(695,-90) ; v1(855,-660) P3.15
PE6: P3.14 U1.1 | length 2242.4
  Top Layer w10: v1(-375,-350) -375,-152.29 U1.1
  Bottom Layer w10: v1(-375,-350) -141.01,-350 107.99,-599 147.87,-599 186.87,-560 P3.14
RESET: P1.3 SW1.1 SW1.2 U1.13 | length 4059.5
  Top Layer w10: U1.13 70.57,-246.37 94.82,-270.63 134.37,-270.63 v1(140,-265) ; v1(205,-375) 205,-540 185,-560 185,-610 275,-700 365,-700 v1(395,-700) ; v1(838.03,536.97) 1148.03,226.97 1148.03,-393.08 936.11,-605 v1(885,-605) ; v1(995,-760) 996.5,-758.5 SW1.2 SW1.1
  Bottom Layer w10: v1(140,-265) 95,-310 95,-350 118,-373 203,-373 v1(205,-375) ; v1(395,-700) 643.99,-700 652.99,-691 677.01,-691 686.01,-700 775,-700 ; P1.3 815,560 v1(838.03,536.97) ; v1(885,-605) 815,-605 775,-645 775,-700 ; v1(995,-760) 935,-700 775,-700
SCK: P1.2 P3.12 U1.9 U2.3 U3.11 U4.11 | length 8214.5
  Top Layer w10: U3.11 -716,-1355.91 -643.88,-1428.03 -377.2,-1428.03 -368.03,-1428.03 -234,-1294 -222.99,-1294 -198,-1269.01 -198,-1262 ; v1(-715,1406.97) -597.25,1524.72 U2.3 ; U1.9 -163.03,-296.66 -163.03,-328.03 -42.06,-449 94,-449 v1(95,-450) ; v1(135,-570) 130,-570 -120,-820 -120,-1173.76 -198,-1251.76 -198,-1262 ; U4.11 260,-1475 220,-1515 55,-1515 -198,-1262 ; v1(440,705) 443.5,708.5 513.45,708.5 715,910.05 P1.2 ; v1(720,425) 720,416.01 949,187.01 949,-224 v1(1085,-360)
  Bottom Layer w10: v1(-715,1406.97) -715,1381.82 -763.88,1332.94 -808.88,1332.94 -887,1254.82 -887,1015.18 -599.82,728 417,728 v1(440,705) v1(720,425) ; v1(135,-570) 140,-570 95,-525 v1(95,-450) 99,-446 154.94,-446 169.94,-461 984,-461 v1(1085,-360) P3.12
SS: P3.13 U1.8 U2.2 U3.12 U4.12 | length 7648.7
  Top Layer w10: v1(-750,1415) -620.59,1544.41 U2.2 ; U3.12 -666,-1329 -590.97,-1404.03 -387.14,-1404.03 ; -384.21,-1404.03 v1@-245.18,-1265 ; v1@-240,-1259.82 -145,-1164.82 -145,-808.99 133.99,-530 v1(160,-530) ; v1(-195,-1310) 34,-1539 244.4,-1539 U4.12@310,-1473.4 ; U1.8 -190,-279.08 -190,-335 -46,-479 126,-479 v1(130,-475) ; v1(690,395) 910,175 910,-350 v1(1025,-465)
  Bottom Layer w10: v1(-750,1415) -750,1380.76 -773.82,1356.94 -818.82,1356.94 -911,1264.76 -911,1005.24 -609.76,704 381,704 v1(690,395) ; v1(-240,-1265) v1(-195,-1310) ; v1(160,-530) 130,-500 v1(130,-475) 150,-475 160,-485 993.94,-485 v1@1018.94,-460 ; v1@1025,-460 P3.13
USB: C2.2 C3.1 R2.2 U1.2 U1.7 U5.2 U5.4 U5.7 U5.8 USB.1 | length 5240.3
  Top Layer w10: U1.2 -245.19,-69.39 -245.19,-64.66 -224.47,-43.95 -195.04,-43.95 -110.76,-128.23 -110.76,-157.66 -131.48,-178.38 -136.2,-178.38 U1.7 -135.02,-181.92 -214,-260.9 -214,-566 -135,-645 v1(-125,-645) ; v1(1415,-1195) 1415,-1355 1690,-1630 ; 1683,-1663 1690,-1656 1690,-1630 ; R2.2 1856.1,-1463.9 1690,-1630
  Top Layer w14: 1925,-2005 1937.62,-2005 USB.1
  Top Layer w20: C3.1 1335.24,-2240 1665,-2240 1720,-2185 1720,-2086.85 ; U5.4 1623,-1813 1631,-1805 ; U5.2 1633,-1713 ; U5.7 1693,-1713 1663,-1683 ; U5.8 1683,-1663 1663,-1683 ; 1925,-2005 1801.85,-2005 1720,-2086.85 ; 1631,-1805 1648,-1788 1648,-1728 1633,-1713 ; 1631,-1805 1656.15,-1830.15 C2.2 1720,-2086.85 ; 1633,-1713 1663,-1683
  Bottom Layer w10: v1(-125,-645) -125,-655 424,-1204 1406,-1204 v1(1415,-1195)
VCC: C1.2 C4.1 P1.4 P2.1 P3.16 U1.14 U1.24 U1.34 U1.44 U3.10 U3.16 U4.10 U4.16 U5.1 U5.5 U5.6 U6.3 | length 857.1
  Top Layer w10: v1(-766,-1374) U3.10 ; U3.16 v1(-421.28,-1293.72) ; U4.10 v1(210,-1350) ; U4.16 v1(556.42,-1395) ; C1.2@1650.22,-2104.54 1656.15,-2104.54 C1.2
  Top Layer w20: C4.1 1460,-2174.76 ; v1(1475,-2159.76) 1460,-2174.76 ; v1(1483,-1663) U5.1 ; C1.2 1584.15,-2205 1490.24,-2205 1460,-2174.76 ; U5.5 U5.6 v1(1838,-1763)
VDD_PA: C8.2 C9.2 L3.2 U2.11 | length 186.3
  Top Layer w10: U2.11@-388.34,1481.04 -373.28,1465.98
  Top Layer w14: -373.28,1465.98 -355.51,1465.98 -335.82,1446.3 L3.2
pads on no net: C5.2 Designator1.1 Designator2.1 Designator3.1 Designator4.1 U4.9 USB.4 USB.CASE
copper on no net: | length 66.7
  Top Layer w3.94: 426.2,1609.41 492.9,1609.41
  other v2: -3.71,2185.81

## Polygon pours and split planes (outlines as drawn)
GND on Top Layer "Top Layer-No Net" (solid, pour order 10): -2362.44,-1888.39 -1890,-2360.83 1889.53,-2360.83 2361.97,-1888.39 2361.97,1891.14 1889.53,2363.58 -551.42,2363.58 -551.42,2025 -1890,2025 -1890,2363.58 -2362.44,1891.14
3V3 on Bottom Layer "Top Layer-No Net" (solid, pour order 9): -640,1050 422.45,1050 422.45,1675 -640,1675
VCC on Bottom Layer "Top Layer-No Net" (solid, pour order 8): -2364.21,-1893.76 -1891.76,-2366.21 1887.76,-2366.21 2360.21,-1893.76 2360.21,1885.76 1887.76,2358.21 470.44,2358.21 470.44,988.13 -1891.76,988.13 -1891.76,2358.21 -2364.21,1885.76

## Other copper
Bottom Layer:
  text "Thomas Kilbride (admin@obnauticus.com)" at -805,-1870 h40
  text "Lior Ben-Yehoshua" at -805,-1995 h40
  text "obnauticus.com" at -700,-2315 h60

## Silkscreen, mask and mechanical layers (free items; w line width, h text height)
Top Overlay:
  drawing of 37 lines, arcs and shapes, not listed
Mechanical 1:
  the board outline again, w0.5

## Text inside footprints (layer, text, board x,y; h text height)
C3: Top Overlay "+" at 1119.5,-2211.27 h49.21
C4: Top Overlay "+" at 1309.5,-2211.27 h49.21
P1: Top Overlay "4" at 515,1280 h49.21; Top Overlay "1" at 535,1180 h49.21; Top Overlay "3" at 895,1180 h49.21; Top Overlay "6" at 895,1280 h49.21